# Altium PCB jaroo_fuck_navid_gun_xc_1.0.PcbDoc
Units mil, origin at the board's own origin, x right, y up, seen from the top; angles counter-clockwise.
Board outline 4724.42 x 3070.87 mil, 2 copper layers (Top Layer, Bottom Layer), stack 61.756 mil thick; 56 components, 37 nets, 171 pads, 0 vias.
Unrouted connection lines stored in the file: 16.
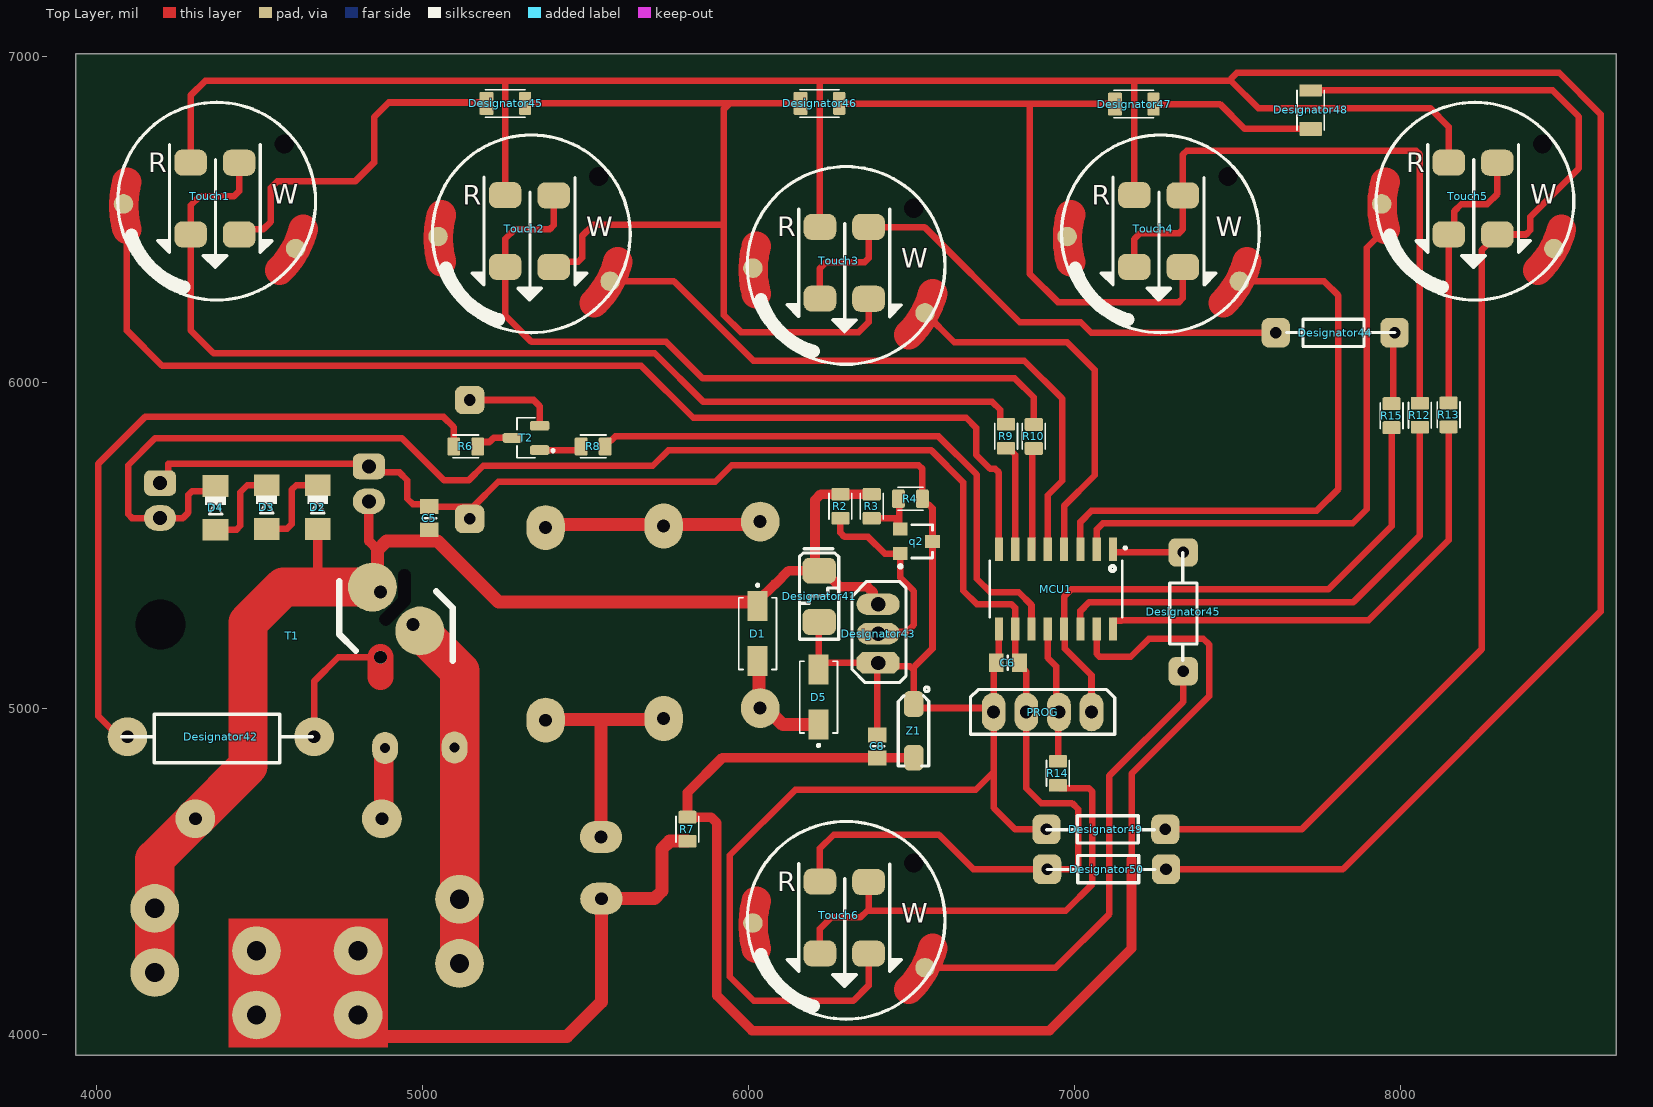
[diagram p0: Top Layer view]
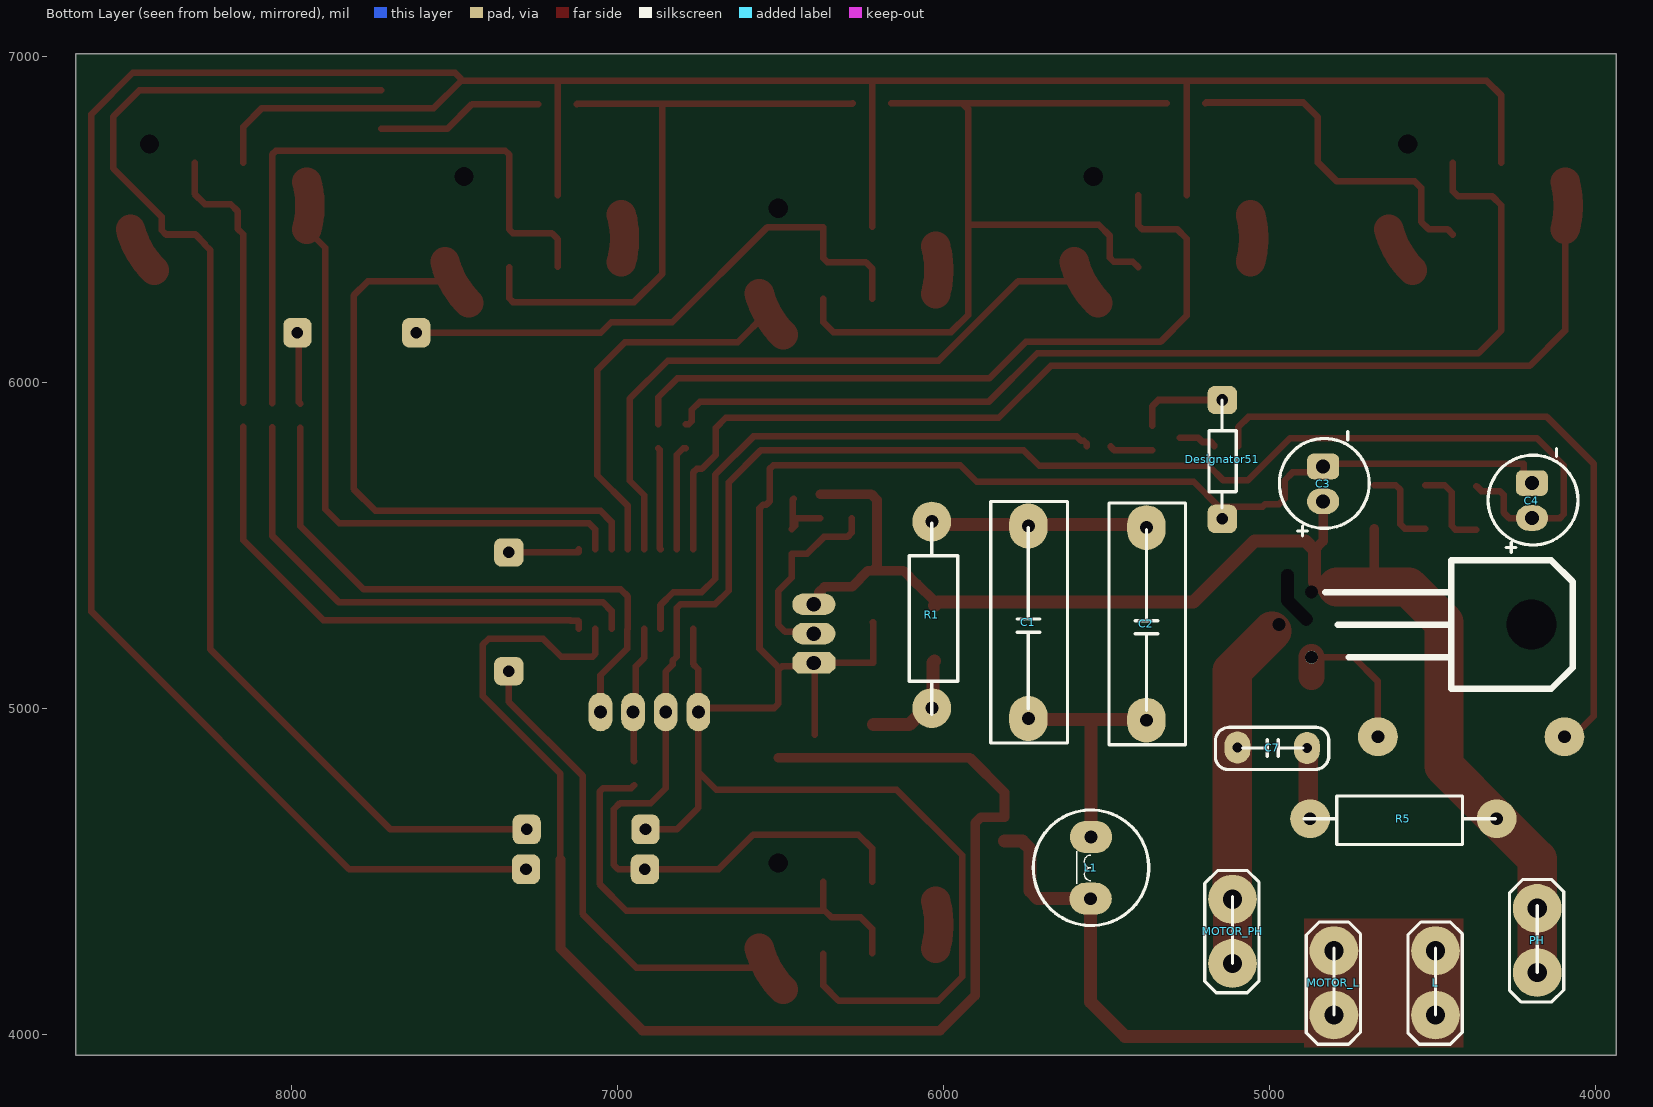
[diagram p1: Bottom Layer view, seen from below]
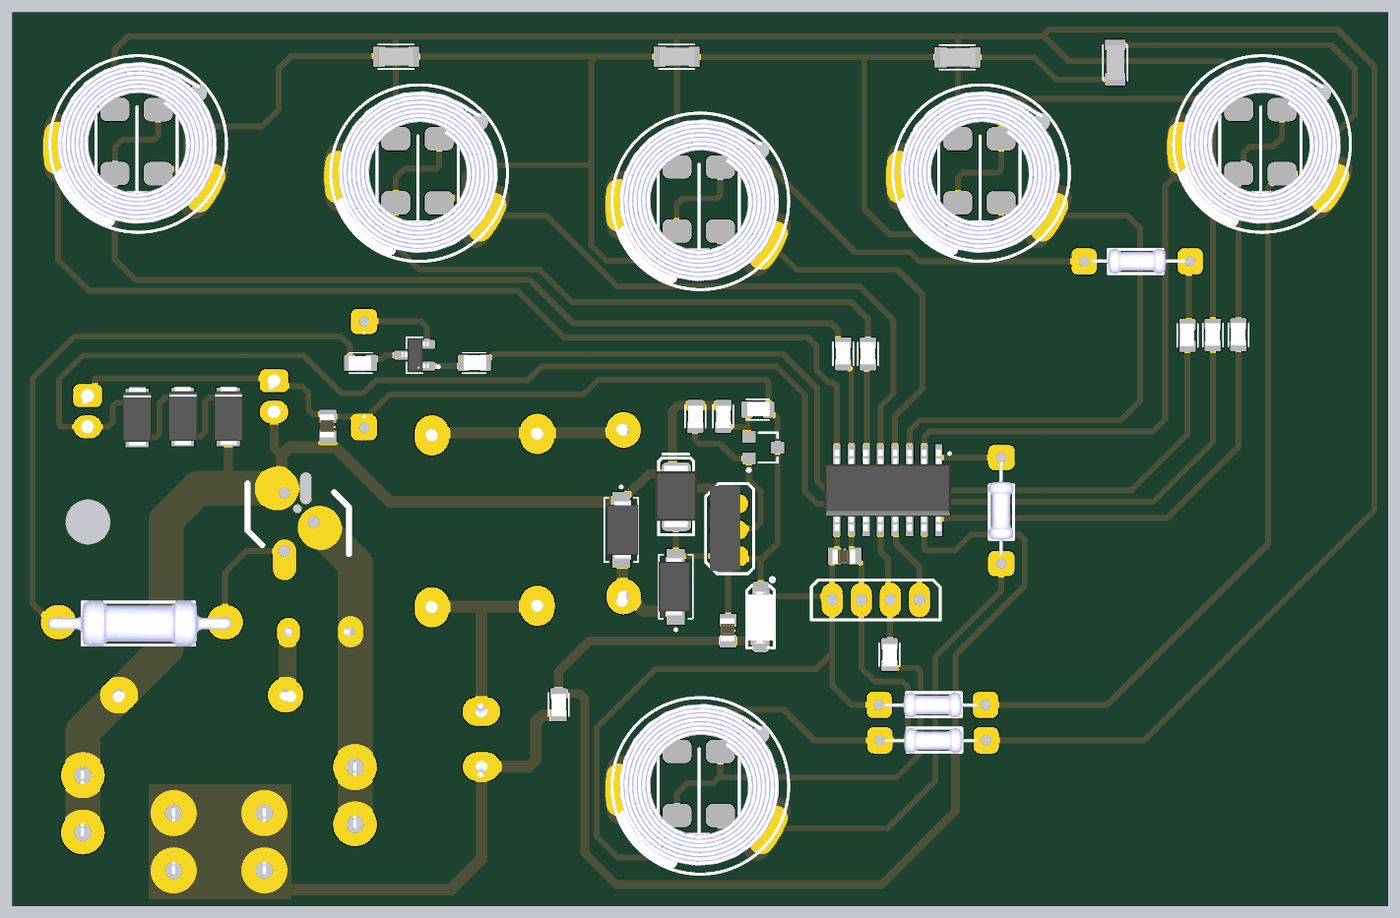
[diagram p2: 3D render of the assembled board from above, using the file's embedded part models]
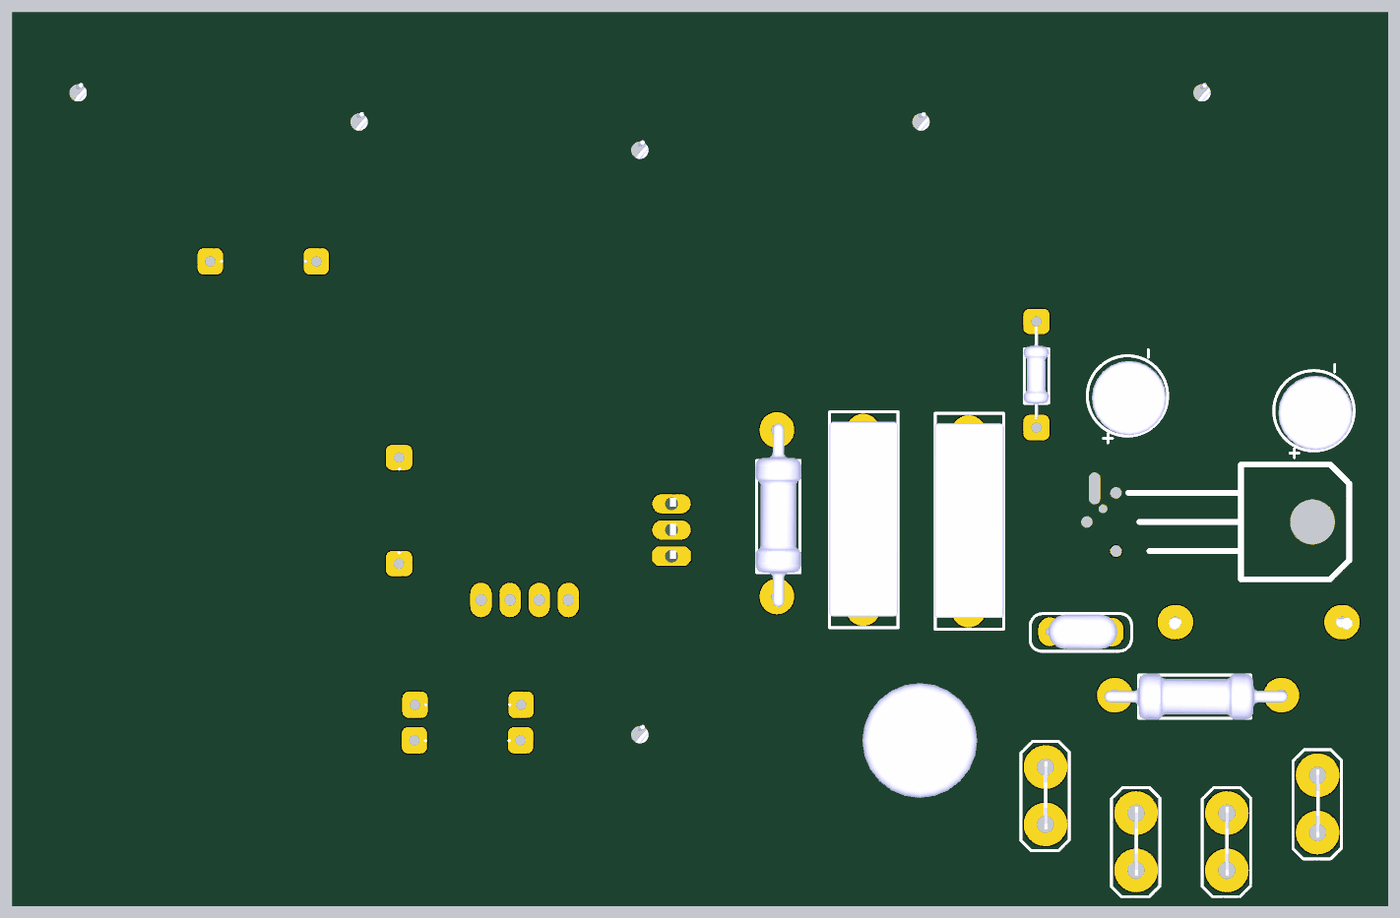
[diagram p3: 3D render of the assembled board from below, using the file's embedded part models]

## Layer stack, top to bottom
Top Solder: solder mask 1, SM-001, Dk 4
Top Layer: signal copper 1.378
Dielectric 1: core 59, Core-043, Dk 4.3
Bottom Layer: signal copper 1.378
Bottom Solder: solder mask 1, SM-001, Dk 4

## Board outline
3937,3937 8661.42,3937 8661.42,7007.87 3937,7007.87

## Design rules (kind name [scope] priority, off if disabled: settings)
Clearance COM [InComponent('T1');] p1: gap=0 ignorepadtopadclearanceinfootprint=FALSE
Clearance Clearance_1 [All] p2: gap=15 ignorepadtopadclearanceinfootprint=FALSE
Clearance POWER [InNetClass('power')] p3: gap=20 ignorepadtopadclearanceinfootprint=FALSE
PolygonConnect [All] p1: connectstyle=Relief reliefconductorwidth=10 reliefentries=4 polygonreliefangle="90 Angle" airgapwidth=10
RoutingVias [All] p1: holewidth=28 width=50 viastyle="Through Hole" minholewidth=28 minwidth=50 maxholewidth=28 maxwidth=50
SolderMaskExpansion [All] p1: expansion=4 istentingtop=FALSE
Width LINE [InNetClass('power')] p1: maxlimit=120 minlimit=20 preferedwidth=50 minimp=50.000000 maximp=50.000000 favimp=50.000000 checkconnectedcopper=TRUE
Width [All] p2: maxlimit=120 minlimit=15 preferedwidth=15 minimp=50.000000 maximp=50.000000 favimp=50.000000
30 further rules are at their usual default settings.

## Classes and differential pairs
net class power: +5 L NetC7_2
component class U_Traiak: C7 C8 R5 R6 R7 R8 T1 T2 Z1
component class U_Power: C1 C2 C3 C4 C5 C6 D1 D2 D3 D4 D5 L1 q2 R1 R2 R3 R4
component class U_Mcu: MCU1 PROG
component class U_Connector: L MOTOR_L MOTOR_PH PH
component class U_Capacitive_touch: R9 R10 R12 R13 R14 Touch1 Touch2 Touch3 Touch4 Touch5

## Components (designator, comment, footprint, x,y, rotation, side; value= is the part's Value field where it differs from the comment)
C1 "1UF" CAP/0.22uF/275v/mkt 5740,4969 r90 bottom
C2 "1UF" CAP/0.22uF/275v/mkt 5378,4964 r90 bottom
C3 "680uF/16V" cap/330u/16v 4836,5742.07 r270 bottom
C4 "680uF/16V" cap/330u/16v 4196,5691 r270 bottom
C5 "100nF" CAP-0805 5021.85,5619.85 r270 top
C6 "100nF" CAP-0805 6759.01,5140.85 r0 top
C7 "100nF/400V" CAP/100nF/275V/poly 4885.69,4878.64 r0 bottom
C8 "cap" CAP-0805 6395.85,4919.85 r270 top
D1 "M7" DIOD/1N4007/SMD 6028,5314.75 r270 top
D2 "M7" mini_melf 4681,5612 r270 top
D3 "M7" mini_melf 4524.46,5612 r270 top
D4 "M7" mini_melf 4367.92,5609.45 r270 top
D5 "M7" DIOD/1N4007/SMD 6215,4949.75 r90 top
Designator41 "Comment" TVS-5V-SMD 6217,5265 r90 top
Designator42 "Comment" RES/1W 4668,4913 r180 top
Designator43 "Comment" mje13007 6396,5143 r90 top
Designator44 "Comment" RES/0.25W 7617,6152 r0 top
Designator45 "Comment" RES/1206 5255,6850 r0 top
Designator45 "Comment" RES/0.25W 7333,5114 r90 top
Designator46 "Comment" RES/1206 6218,6850 r0 top
Designator47 "Comment" RES/1206 7182,6848 r0 top
Designator48 "Comment" RES/1206 7729.15,6834.82 r90 top
Designator49 "Comment" RES/0.25W 7278.43,4629 r180 top
Designator50 "Comment" RES/0.25W 7280.43,4507 r180 top
Designator51 "Comment" RES/0.25W 5145.01,5581.3 r90 bottom
L "pin-k" pin_k 4491.43,4060.15 r90 bottom
L1 "inductor" inductor-9*12 5548.98,4417.02 r90 bottom
MCU1 "bs83b08-a" bs83b08-a 6918,5366 r270 top
MOTOR_L "pin-k" pin_k 4803.09,4060.15 r90 bottom
MOTOR_PH "pin-k" pin_k 5114,4218.15 r90 bottom
PH "pin-k" pin_k 4179.76,4190.15 r90 bottom
PROG "" CONECTOR/XH/4PIN 6752,4989 r0 top
q2 "TL431" TL431 6465.19,5547.91 r270 top
R1 "RES/>=1W" RES/1W 6036,5573 r270 bottom
R2 "10k" RES/0805 6318.75,5578.77 r90 top
R3 "10k" RES/0805 6414.68,5578.77 r90 top
R4 "10k" RES/0805 6538.09,5679.75 r180 top
R5 "330R" RES/1W 4304.06,4662 r0 bottom
R6 "r" RES/0805 5091.91,5766.5 r0 top
R7 "1M" RES/0805 5849.75,4588.53 r90 top
R8 "r" RES/0805 5565,5840 r180 top
R9 "100R" RES/0805 6753.25,5876.09 r270 top
R10 "100R" RES/0805 6838.25,5875.47 r270 top
R12 "100R" RES/0805 8022.25,5940.47 r270 top
R13 "100R" RES/0805 8110.25,5941.47 r270 top
R14 "100R" RES/0805 6985.75,4759.91 r90 top
R15 "100R" RES/0805 7935.25,5939.09 r270 top (schematic designator R14)
T1 "bta16" BTA16-V2\ 4972,5257 r270 top
T2 "NPN" SOT23 5360,5792.23 r180 top
Touch1 "touch-fanar-2led" fanar-touch-2led 4370.08,6575 r0 top
Touch2 "touch-fanar-2led" fanar-touch-2led 5334.65,6475 r0 top
Touch3 "touch-fanar-2led" fanar-touch-2led 6300,6377.95 r0 top
Touch4 "touch-fanar-2led" fanar-touch-2led 7263.78,6475 r0 top
Touch5 "touch-fanar-2led" fanar-touch-2led 8228.35,6575 r0 top
Touch6 "touch-fanar-2led" fanar-touch-2led 6300,4370.08 r0 top locked
Z1 "4.7V" DIOD/RS1J 6511,4928 r270 top

## Footprints (in the part's own frame and the unit in brackets; to place one, negate y for a bottom-side part, rotate by r counter-clockwise, add the part's x,y. Pads: shape width x height; smd on the part's side, far side on the other; paste and mask are expansions set on the pad)
bs83b08-a [mm]
  rect 1.8x0.64 smd: 1(-3.105,5.08) 2(-3.105,3.81) 3(-3.105,2.54) 4(-3.105,1.27) 5(-3.105,0) 6(-3.105,-1.27) 7(-3.105,-2.54) 8(-3.105,-3.81) 9(3.105,-3.81) 10(3.105,-2.54) 11(3.105,-1.27) 12(3.105,0) 13(3.105,1.27) 14(3.105,2.54) 15(3.105,3.81) 16(3.105,5.08)
  silkscreen extent -3.3,-4.51 2.2,6.13, body extent -3.55,-4.87 3.56,6.15, height 2.14
BTA16-V2\ [mm] "Triak v2"
  round 0 hole 3.9: 0(0,-19.677)
  round 0 on Bottom Solder: 63(0.969,0.032) 63(3.382,-0.677)
  round 0 hole 1 slot 2.794 at 0 deg: 80(-2.93,-0.677)
  round 0 hole 1 slot 3.048 at 135 deg: 80(-1.145,-1.411)
  round 0 hole 1: A(0,0) M(-2.54,-2.54)
  rrect70% 0x0 on Bottom Solder rot 140: A(4.652,0.823)
  round 3.81 smd paste-3.81 mask+0.051: A1(-2.921,-3.175) A2(0.494,0.519)
  round 1.016 hole 1: G(2.54,-2.54)
  rrect50% 0x0 on Bottom Solder rot 140: M(2.112,-2.177)
  Top Layer lines w2.032: 4.065,-2.54 2.541,-2.54
  silkscreen extent -3.37,-5.77 2.81,3.09
CAP-0805 [mm]
  rect 1.15x1.45 smd: 1(0.025,-0.022) 2(1.825,-0.022)
  silkscreen extent 0.93,-0.57 0.93,0.53, body extent -0.17,-0.71 1.84,0.54, height 0.94
CAP/0.22uF/275v/mkt [mm]
  oval 3.5x3 hole 1: 1(0,0) 2(15,0)
  silkscreen extent -1.91,-3.05 16.91,2.92, body extent -0.94,-3.05 16.06,2.95, height 11.5
CAP/100nF/275V/poly [mm]
  oval 2x2.5 hole 0.762: 1(0,0) 2(5.418,-0.035)
  silkscreen extent -1.7,-1.61 7.13,1.67, body extent -0.46,-1.52 5.54,1.48, height 12.8
cap/330u/16v [mm]
  oval 2x2.5 hole 1.1: +(2.72,0)
  rrect50% 2x2.5 hole 1.1: -(0,0)
  silkscreen extent -2.7,-3.41 5.4,3.59, body extent -1.74,-3.02 4.76,3.48, height 11
CONECTOR/XH/4PIN [mm]
  oval 1.85x3 hole 1: 1(0,0) 2(2.54,0) 3(5.08,0) 4(7.62,0)
  silkscreen extent -1.81,-1.73 9.43,1.75
DIOD/1N4007/SMD [mm]
  rect 2.33x1.56 smd: A(4.299,0) K(0.019,0)
  silkscreen extent -1.7,-1.48 4.96,1.48, body extent -0.44,-1.24 4.76,1.49, height 2.6
DIOD/RS1J [mil]
  rrect50% 78.74x60 smd: A(79.25,-4.16) K(-85.75,-4.16)
  silkscreen extent -138,-52 104,43, body extent -91,-57 90,46, height 83
fanar-touch-2led [mil]
  oct 0x0 hole 59.06: 5(206.71,156.04)
  rrect60% 100x80 smd: AR(-80.55,98.79) AW(68.32,98.28) KR(-80.55,-121.21) KW(68.32,-121.72)
  round 60 smd paste-60: T(-286.39,-27.99) T(241.59,-165.09)
  Top Layer lines w90: -275.86,39.27 ccw(c-5.4,-33.2) -275.75,-106.1 ; 191.96,-231.81 ccw(c-5.4,-33.2) 241.59,-165.09 ccw(c-5.4,-33.2) 265.05,-105.67
  silkscreen extent -304,-323 303,283, body extent -384,-398 381,369, height 634
inductor-9*12 [mm]
  oval 2.5x3.3 hole 1: 1(-0.01,0) 2(4.8,-0.025)
  silkscreen extent -2.1,-4.52 6.9,4.47, body extent -2.73,-5.09 7.27,4.91, height 12
mini_melf [mm]
  rect 1.7x2 smd: A(1.557,-0.049) K(-1.843,-0.049)
  silkscreen extent -1.01,-0.84 0.36,0.74, body extent -2.79,-1.31 2.35,1.25, height 2.5
mje13007 [mil]
  oct 66x132 hole 44: B(-3.59,-1.84)
  oval 66x132 hole 44: C(86.41,-1.84) E(176.41,-1.84)
  silkscreen extent -64,-87 246,78, body extent -58,-41 241,63, height 520
pin_k [mm]
  round 3.8 hole 1.5: 1(0,0) 1(5,0)
  silkscreen extent -2.29,-2.07 7.24,2.15, body extent -0.46,-0.17 5.54,0.13, height 8.52
RES/0.25W [mm]
  rrect50% 2.2x2.3 hole 0.9: 1(0,0) 2(9.258,0)
  silkscreen extent 0.85,-1.07 9.26,1.05, body extent 0.81,-1.08 8.41,1.12, height 2.1
RES/1W [mm]
  oval 3.1x3 hole 1: 1(0,0) 2(14.527,0)
  silkscreen extent 0.11,-1.76 15,2.02, body extent -0.56,-1.87 15.44,2.13, height 5
RES/0805 [mm]
  rrect25% 1x1.42 smd: 1(0.113,0.933) 2(1.983,0.933)
  silkscreen extent 0.05,0.04 2.05,1.82, body extent 0,0.28 2,1.53, height 0.6
RES/1206 [mm]
  rrect14% 1.09x1.77 smd: 1(-1.469,0.131)
  rrect14% 0.94x1.77 smd: 2(1.536,0.131)
  silkscreen extent -1.55,-0.93 1.55,1.2, body extent -1.51,-0.64 1.59,0.91, height 0.55
SOT23 [mil]
  rrect50% 60x30 smd: 1(0.24,0) 2(0.24,-74.8) 3(83.7,-37.4)
  silkscreen extent -45,-99 70,24, body extent -7,-96 86,19, height 44
TL431 [mil]
  rect 40x45 smd: A(35.51,99.24) C(72.91,0.81) REF(-1.9,0.81)
  silkscreen extent -16,-4 117,99
TVS-5V-SMD [mm]
  rrect50% 2x2.6 smd: 1(4,0) 2(0,0)
  silkscreen extent -1.33,-1.53 5.72,1.54, body extent -0.66,-1.79 4.74,1.83, height 2.43

## Part data
C1 C2: library part cap-mkt
C3 C4: library part cap-electrolit
C5 C6 C8: library part cap_smd
C7: library part cap-poly
D1 D2 D3 D4 D5: library part DIOD/RECTIFIERS
PROG: library part CONECTOR/XH/4PIN
R2 R3 R4 R6 R7 R8 R9 R10 R12 R13 R14 R15: library part RES/SMD
R5: library part RES/>=1W
Z1: library part zener-0.5w

## Nets (pads, with @x,y where several pads share a name; then routed paths per layer and width w, separated by ;. In a path a pad name is that pad's centre, name@x,y a point inside that pad or via, vN(x,y) a via of type N, cw(c..) or ccw(c..) an arc to the next point about the centre after c; other vN are vias at no path point)
+3.3: C4.+ C6.2 D4.K Designator50.1 Designator50.2 MCU1.10 PROG.2 Touch1.AR Touch2.AR Touch3.AR Touch4.AR Touch5.AR Touch6.AR | length 15414
  Top Layer w20: Touch1.AR 4289.53,6879.53 4335,6925 5250,6925 ; D4.K 4350.72,5666.72 4294.72,5666.72 4283,5655 4283,5601 4265.93,5583.93 C4.+ 4109.72,5583.93 4098,5595.64 4098,5746 4181,5829 4937,5829 5067,5699 5142,5699 5187,5744 5707,5744 5754,5791 6561,5791 6659,5693 6659,5361 6700,5320 6806.28,5320 6818,5308.28 MCU1.10 6818,5158.77 6830.87,5145.91 C6.2 6830.87,5134.09 6852,5112.96 PROG.2 6852,4755 6898,4709 6899,4710 6992,4710 7011,4691 7011,4520 6998,4507 Designator50.2 6690,4507 6584,4613 6261.45,4613 6219.45,4571 Touch6.AR ; Touch2.AR 5254.09,6920.91 5250,6925 ; Touch3.AR 6219.45,6920.55 6215,6925 ; Touch4.AR 7183.23,6917.23 7191,6925 ; Designator50.1 7823,4507 8613,5297 8613,6822 8486,6949 7498,6949 7479,6930 7479,6925 ; Touch5.AR 8147.79,6783.21 8090,6841 7563,6841 7479,6925 ; 5250,6925 6215,6925 ; 6215,6925 7191,6925 ; 7191,6925 7479,6925
+5: C3.+ C5.2 D1.K D2.A Designator41.1 Designator43.E PH.1 R2.2 R3.2 R5.1 T1.A1 | length 4170.1
  Top Layer w30: 4668,5372 4679.08,5383.08 D2.A ; C3.+ 4836,5513 4863,5486 ; D1.K 6028,5315.29 6028,5329.16 6080.84,5382 6083,5382 6123.48,5422.48 Designator41.1 ; R3.2 R2.2 6221.57,5656.85 6204,5639.28 6204,5435.48 Designator41.1 ; Designator43.E 6383,5334.25 6383,5355.43 6365.43,5373 6280.83,5373 6231.35,5422.48 Designator41.1
  Top Layer w40: T1.A1 4863,5388 4863,5486 4891,5514 5046,5514 5234,5326 6017.29,5326 D1.K@6028,5315.29
  Top Layer w120: PH.1@4179.76,4190.15 4179.76,4387 4179.76,4537.78 4303.98,4662 R5.1 R5.1 4466,4823.86 4466,5264 4574,5372 4668,5372 T1.A1@4793.74,5372
GND: C3.- C4.- C5.1 C6.1 C8.1 D5.A Designator41.2 Designator43.B Designator45.1@5197.18,6855.15 Designator45.2@5315.49,6855.15 Designator46.1 Designator46.2 Designator47.1 Designator47.2 Designator48.1 Designator48.2 Designator49.1 Designator49.2 Designator51.1 Designator51.2 MCU1.9 PROG.1 q2.A R4.1 T2.2 Touch1.KW Touch2.KW Touch3.KW Touch4.KW Touch5.KW Touch6.KW Z1.K | length 17123.1
  Top Layer w20: C4.- 4197.56,5691 4221.57,5715.01 4221.57,5750 4828.07,5750 C3.- 4854.29,5723.79 4930.21,5723.79 4954,5700 4954,5643 4970.5,5626.5 5013.36,5626.5 C5.1 5156.87,5618.87 5233,5695 5898,5695 5949,5746 6521.91,5746 6533.62,5734.28 R4.1 6533.62,5634.73 6543.31,5625.05 6552.71,5625.05 6564.43,5613.33 q2.A 6564.43,5183.43 6511,5130 ; Touch1.KW 4455.11,6470 4513,6470 4535,6492 4535,6596 4555,6616 4794,6616 4852,6674 4852,6813 4897,6858 5194.32,6858 Designator45.1@5197.18,6855.15 ; Designator51.2 5341.22,5945.78 5359.76,5927.24 T2.2 ; Designator45.2@5315.49,6855.15 5942,6855.15 ; Touch2.KW 5419.68,6370 5478.28,6370 5490,6381.72 5490,6449 5524,6483 5925,6483 ; Designator46.1 5942,6855.15 ; Designator41.2 6216,5264 6216,5140 6216.59,5139.41 Designator43.B ; Designator46.2 6279.69,6853.94 6863,6853.94 ; Touch6.KW 6368.32,4150.32 6322,4104 6016,4104 5943,4177 5943,4550 6144,4751 6697,4751 6752,4806 ; Touch3.KW 6368.32,6184.32 6338,6154 5977,6154 5925,6206 5925,6483 ; C8.1 6395,5136.57 Designator43.B ; PROG.1@6735.37,5001.37 6519.21,5001.37 Z1.K 6506.84,5117.16 6494,5130 6407.25,5130 Designator43.B ; PROG.1@6737.5,5003.5 6752,5018 6752,5120.48 6768,5136.48 MCU1.9 ; PROG.1 6752,4863 6752,4806 ; Designator49.2 6818,4629 6752,4695 6752,4806 ; Designator47.1 7123.39,6853.94 6863,6853.94 ; Designator47.2 7445.85,6853.15 7522,6777 Designator48.1 ; Designator49.1 7696,4629 8248,5181 8248,6404.62 8265.31,6421.92 8265.31,6424.35 8294.24,6453.28 Touch5.KW 8384.28,6453.28 8397,6466 8397,6507 8546,6656 8546,6815 8465.69,6895.31 Designator48.2 ; Touch4.KW 7332.1,6257.72 7320.38,6246 6949,6246 6862,6333 6862,6852.94 6863,6853.94 ; 5925,6483 5925,6838.15 5942,6855.15
ICPCK: MCU1.12 PROG.3 R14.2 | length 421.1
  Top Layer w20: MCU1.12 6918,5155 6944,5129 6944,4997 PROG.3 6950.5,4987.5 6950.5,4839.5 R14.2
ICPDA: MCU1.13 PROG.4 R15.2 | length 1784.3
  Top Layer w20: PROG.4 7052,5102 6970.6,5183.4 6970.6,5241.16 MCU1.13 6968,5343 6990,5365 7778,5365 7972,5559 R15.2
L: L1.1 L.1 MOTOR_L.1 R7.1 | length 1546.8
  Top Layer w40: MOTOR_L.1@4803.09,4060.15 4869.24,3994 5443,3994 5548.98,4099.98 L1.1 5711.57,4416.63 5735,4440.06 5735,4569.57 5758.43,4593 R7.1
NetC1_1: C1.1 C2.1 L1.2 | length 727.1
  Top Layer w40: C2.1 5380.5,4966.5 5554,4966.5 ; L1.2 5548,4960.5 5554,4966.5 ; C1.1 5737.5,4966.5 5554,4966.5
NetC1_2: C1.2 C2.2 R1.1 | length 665.6
  Top Layer w40: C2.2 5387.22,5563.78 6026.78,5563.78 R1.1
NetC7_1: C7.1 R5.2 | length 220.7
  Top Layer w60: R5.2 4882.1,4668.1 4882.1,4875.05 C7.1
NetC7_2: C7.2 MOTOR_PH.1 T1.A2 | length 1098.1
  Top Layer w120: T1.A2 5114.76,5115.25 5114.76,4880 MOTOR_PH.1@5114.76,4387 ; MOTOR_PH.1@5114,4218.15 MOTOR_PH.1@5114,4415
NetD1_A: D1.A D5.K R1.2 | length 348.8
  Top Layer w40: D1.A 6032,5141.5 6032,5005.06 R1.2 6055.17,5001.06 6105.73,4950.5 D5.K D5.K@6214.25,4951.24
NetD2_K: D2.K D3.A | length 273.9
  Top Layer w20: D3.A 4585.31,5550.69 4600,5565.38 4600,5671 4613.55,5684.55 D2.K
NetD3_K: D3.K D4.A | length 273.5
  Top Layer w20: D4.A 4430.28,5548.14 4442,5559.86 4442,5663 4463.55,5684.55 D3.K
NetMCU1_11: MCU1.11 R8.1 | length 1799.3
  Top Layer w20: R8.1 5560.53,5811.52 5570.22,5821.2 5578.49,5821.2 5591.28,5834 6583,5834 6700,5717 6700,5398 6742,5356 6829,5356 6868,5317 MCU1.11
Netq1_B: Designator43.C q2.C R2.1 | length 610.9
  Top Layer w20: R2.1 6282,5539 6295,5526 6367,5526 6418,5475 q2.C 6466,5401 6507,5360 6507,5256 6486,5235 6403.43,5235 Designator43.C
Netq2_REF: q2.REF R3.1 R4.2 | length 196.5
  Top Layer w20: R3.1 6455.28,5583.23 q2.REF@6455.28,5559.8 ; R4.2 6463,5640 6463,5552.8 q2.REF
NetR6_1: Designator42.1 Designator42.2 R6.1 T1.G | length 2515.8
  Top Layer w20: Designator42.2 4070,4913 4007,4976 4007,5751 4150,5894 5065,5894 5096.38,5862.62 R6.1 ; Designator42.1 4668,5083 4742,5157 T1.G
NetR6_2: R6.2 T2.3 | length 119.6
  Top Layer w20: R6.2 5170,5807.31 5179.69,5817 5206,5817 5218.63,5829.63 T2.3
NetR8_2: R8.2 T2.1 | length 132.5
  Top Layer w20: T2.1 5477.23,5792.23 5486.91,5801.91 R8.2
NetR9_1: R9.1 Touch1.AW Touch1.KR | length 3277
  Top Layer w20: Touch1.AW 4438.4,6586.4 4422,6570 4317,6570 4290,6543 4290,6454.27 Touch1.KR 4289.53,6159.47 4360,6089 5713,6089 5862,5940 6748,5940 6772.05,5915.95 6772.05,5881.31 6781.73,5871.62 R9.1
NetR10_1: R10.1 Touch2.AW Touch2.KR | length 2300.7
  Top Layer w20: Touch2.AW 5402.96,6481.72 5391.25,6470 5284,6470 5254.09,6440.09 Touch2.KR 5254.09,6204.91 5335,6124 5748,6124 5860,6012 6817,6012 6875,5954 R10.1
NetR11_1: Designator44.1 Designator44.2 R15.1 Touch3.AW Touch3.KR | length 1955.8
  Top Layer w20: Touch3.KR 6218,6258.19 6218,6348 6238,6368 6356,6368 6368.32,6380.32 Touch3.AW 6539.77,6476.23 6832,6184 7019,6184 7051,6152 Designator44.1 ; R15.1 7976.74,5939.36 7976.74,6147.26 Designator44.2
NetR12_1: R12.1 Touch4.AW Touch4.KR | length 1975
  Top Layer w20: Touch4.KR 7183.23,6439.23 7201,6457 7320.38,6457 7332.1,6468.72 Touch4.AW 7332.1,6698.28 7343.81,6710 8047.28,6710 8059,6698.28 R12.1
NetR13_1: R13.1 Touch5.AW Touch5.KR | length 844.6
  Top Layer w20: R13.1 8147.4,5937.4 8147.4,6453.39 Touch5.KR 8165,6471 8165,6525 8186,6546 8265,6546 8296.66,6577.66 Touch5.AW
NetR14_1: R14.1 Touch6.AW Touch6.KR | length 1454.9
  Top Layer w20: Touch6.KR 6219.45,4324.45 6254,4359 6343,4359 6364,4380 ; Touch6.AW 6368.32,4384.32 6364,4380 ; R14.1 6957.38,4756 7043.28,4756 7055,4744.28 7055,4462 6973,4380 6364,4380
TL1: MCU1.7 R9.2 | length 326.2
  Top Layer w20: R9.2 6798.27,5798 6818,5778.27 MCU1.7
TL2: MCU1.6 R10.2 | length 312
  Top Layer w20: MCU1.6 6870.6,5490.84 6870.6,5792.98 R10.2
TL3: 
TL4: MCU1.14 R12.2 | length 1524.3
  Top Layer w20: MCU1.14 7018,5299 7045,5326 7855,5326 8059,5530 R12.2
tl5: MCU1.16 R13.2 | length 1502.4
  Top Layer w20: MCU1.16 7118,5266.39 7120.6,5268.98 7143.23,5268.98 7145.24,5271 7902,5271 8147,5516 R13.2
Touch_1: MCU1.8 Touch1.T | length 3447.9
  Top Layer w20: 4094.33,6468.9 4094.33,6158.67 4202,6051 5671,6051 5831,5891 6668,5891 6698,5861 6698,5778 6741,5735 6756.28,5735 6768,5723.28 MCU1.8
Touch_2: MCU1.5 Touch2.T | length 2014.8
  Top Layer w20: Touch2.T@5576.23,6309.91 5771.59,6309.91 6015.5,6066 6846,6066 6962,5950 6962,5698 6918,5654 MCU1.5
Touch_3: MCU1.4 Touch3.T | length 1181.5
  Top Layer w20: Touch3.T@6541.59,6212.87 6631.45,6123 6977,6123 7062,6038 7062,5715 6968,5621 MCU1.4
Touch_4: MCU1.3 Touch4.T | length 1833.3
  Top Layer w20: MCU1.3 7018,5572 7052,5606 7742,5606 7809,5673 7809,6266 7765.09,6309.91 7506.29,6309.91 Touch4.T@7504.29,6307.92
Touch_5: MCU1.2 Touch5.T | length 1848.9
  Top Layer w20: MCU1.2 7068,5549 7087,5568 7853,5568 7896,5611 7896,6412.31 7952.6,6468.9 ; 7925,6468.9 7925,6522
Touch_on: Designator45.1@7333,5114 Designator45.2@7333,5478.48 MCU1.1 Touch6.T | length 1694.6
  Top Layer w20: Touch6.T@6541.59,4204.99 6941.99,4204.99 7107,4370 7107,4794 7333,5020 Designator45.1@7333,5114 ; MCU1.1 7118,5481.07 7120.6,5478.48 Designator45.2@7333,5478.48
ZDC: C8.2 MCU1.15 R7.2 Z1.A | length 4347.2
  Top Layer w20: MCU1.15 7068,5167 7076.5,5158.5 7172.5,5158.5 7228,5214 7395,5214 7413,5196 7413,5038 7175,4800 7175,4537
  Top Layer w30: Z1.A 5919.75,4848.75 5813,4742 R7.2 5885.43,4666.62 5903,4649.05 5903,4120 6011,4012 6923,4012 7175,4264 7175,4537
pads on no net: T1.0 T1.63 T1.80 T1.A T1.M Touch1.5 Touch2.5 Touch3.5 Touch4.5 Touch5.5 Touch6.5

## Other copper
Top Layer:
  rectangle net L: 4405,3960 4895,4356

## Silkscreen, mask and mechanical layers (free items; w line width, h text height)
Mechanical 1:
  the board outline again, w10

## Text inside footprints (layer, text, board x,y; h text height)
Touch1: Top Overlay "R" at 4158.99,6644.33 h60; Top Overlay "W" at 4538.77,6547.98 h60
Touch2: Top Overlay "R" at 5123.55,6544.33 h60; Top Overlay "W" at 5503.34,6447.98 h60
Touch3: Top Overlay "W" at 6468.69,6350.93 h60; Top Overlay "R" at 6088.91,6447.28 h60
Touch4: Top Overlay "R" at 7052.69,6544.33 h60; Top Overlay "W" at 7432.47,6447.98 h60
Touch5: Top Overlay "R" at 8017.25,6644.33 h60; Top Overlay "W" at 8397.04,6547.98 h60
Touch6: Top Overlay "W" at 6468.69,4343.05 h60; Top Overlay "R" at 6088.91,4439.41 h60